# Altium PCB Attempt1-ADC.PcbDoc (part 2 of 2)
Units mil, origin at the board's own origin, x right, y up, seen from the top; angles counter-clockwise.
Board outline 2118.52 x 1463.27 mil, 4 copper layers (Top Layer, GND Layer 2, PWR Layer 3, Bottom Layer), stack 65.52 mil thick; 32 components, 24 nets, 127 pads, 323 vias.
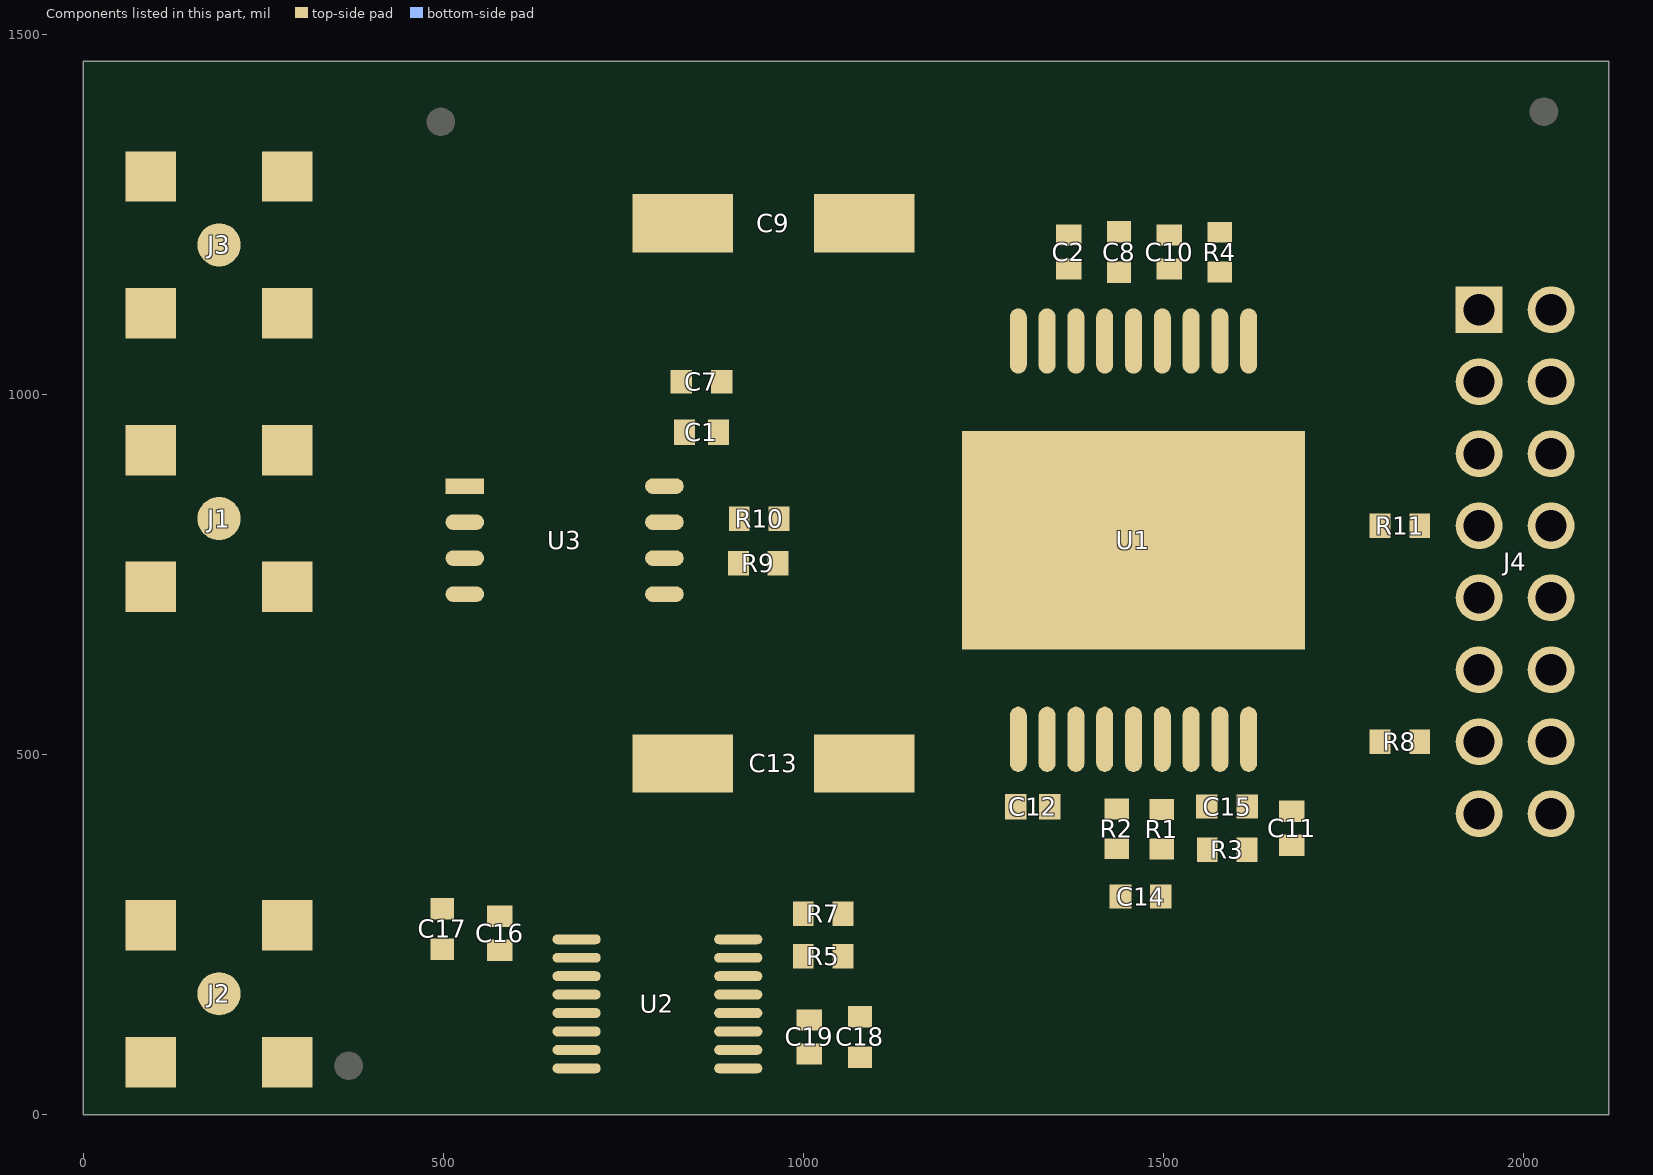
[diagram p4: the components of this part, seen from the top]

## Silkscreen, mask and mechanical layers (free items; w line width, h text height) (continued)
Fab Notes:
  text "N" at 1585,10284.84 h181.06
  text "O" at 1703.33,10284.84 h181.06
  text "T" at 1821.66,10284.84 h181.06
  text "E" at 1901.66,10284.84 h181.06
  text "S" at 1993.32,10284.84 h181.06
  text ":" at 2088.32,10284.84 h181.06
  text "U" at 2169.98,10284.84 h181.06
  text "N" at 2283.31,10284.84 h181.06
  text "L" at 2401.64,10284.84 h181.06
  text "E" at 2483.3,10284.84 h181.06
  text "S" at 2576.63,10284.84 h181.06
  text "S" at 2669.96,10284.84 h181.06
  text "O" at 2798.29,10284.84 h181.06
  text "T" at 2916.62,10284.84 h181.06
  text "H" at 2996.62,10284.84 h181.06
  text "E" at 3113.28,10284.84 h181.06
  text "R" at 3204.94,10284.84 h181.06
  text "W" at 3306.6,10284.84 h181.06
  text "I" at 3454.93,10284.84 h181.06
  text "S" at 3498.26,10284.84 h181.06
  text "E" at 3593.26,10284.84 h181.06
  text "S" at 3719.92,10284.84 h181.06
  text "P" at 3814.92,10284.84 h181.06
  text "E" at 3911.58,10284.84 h181.06
  text "C" at 4003.25,10284.84 h181.06
  text "I" at 4118.24,10284.84 h181.06
  text "F" at 4161.57,10284.84 h181.06
  text "I" at 4248.24,10284.84 h181.06
  text "E" at 4291.57,10284.84 h181.06
  text "D" at 4384.9,10284.84 h181.06
  text "." at 4493.23,10284.84 h181.06
  text "1" at 1585,9969.85 h181.06
  text "." at 1673.33,9969.85 h181.06
  text "F" at 1754.99,9969.85 h181.06
  text "A" at 1836.66,9969.85 h181.06
  text "B" at 1934.99,9969.85 h181.06
  text "R" at 2034.98,9969.85 h181.06
  text "I" at 2136.65,9969.85 h181.06
  text "C" at 2179.98,9969.85 h181.06
  text "A" at 2294.97,9969.85 h181.06
  text "T" at 2384.97,9969.85 h181.06
  text "E" at 2464.97,9969.85 h181.06
  text "P" at 2591.59,9969.85 h181.06
  text "E" at 2688.25,9969.85 h181.06
  text "R" at 2781.58,9969.85 h181.06
  text "I" at 2916.58,9969.85 h181.06
  text "P" at 2959.91,9969.85 h181.06
  text "C" at 3054.91,9969.85 h181.06
  text "-" at 3171.55,9969.85 h181.06
  text "6" at 3226.54,9969.85 h181.06
  text "0" at 3314.87,9969.85 h181.06
  text "1" at 3403.2,9969.85 h181.06
  text "2" at 3493.2,9969.85 h181.06
  text "A" at 3581.53,9969.85 h181.06
  text "C" at 3713.19,9969.85 h181.06
  text "L" at 3828.19,9969.85 h181.06
  text "A" at 3913.19,9969.85 h181.06
  text "S" at 4013.18,9969.85 h181.06
  text "S" at 4106.51,9969.85 h181.06
  text "2" at 4234.84,9969.85 h181.06
  text "." at 4323.17,9969.85 h181.06
  text "2" at 1585,9656.52 h181.06
  text "." at 1673.33,9656.52 h181.06
  text "M" at 1754.99,9656.52 h181.06
  text "A" at 1886.65,9656.52 h181.06
  text "T" at 1976.65,9656.52 h181.06
  text "E" at 2056.64,9656.52 h181.06
  text "R" at 2149.97,9656.52 h181.06
  text "I" at 2251.64,9656.52 h181.06
  text "A" at 2294.97,9656.52 h181.06
  text "L" at 2393.3,9656.52 h181.06
  text ":" at 2476.63,9656.52 h181.06
  text "D" at 1753.32,9341.54 h181.06
  text "I" at 1868.32,9341.54 h181.06
  text "E" at 1911.65,9341.54 h181.06
  text "L" at 2004.98,9341.54 h181.06
  text "E" at 2088.31,9341.54 h181.06
  text "C" at 2179.96,9341.54 h181.06
  text "T" at 2291.61,9341.54 h181.06
  text "R" at 2371.61,9341.54 h181.06
  text "I" at 2473.27,9341.54 h181.06
  text "C" at 2516.61,9341.54 h181.06
  text ":" at 2631.59,9341.54 h181.06
  text "F" at 2713.25,9341.54 h181.06
  text "R" at 2799.92,9341.54 h181.06
  text "4" at 2901.58,9341.54 h181.06
  text "P" at 3023.24,9341.54 h181.06
  text "E" at 3119.9,9341.54 h181.06
  text "R" at 3211.57,9341.54 h181.06
  text "I" at 3346.56,9341.54 h181.06
  text "P" at 3389.89,9341.54 h181.06
  text "C" at 3484.89,9341.54 h181.06
  text "-" at 3601.52,9341.54 h181.06
  text "4" at 3658.18,9341.54 h181.06
  text "1" at 3746.51,9341.54 h181.06
  text "0" at 3834.84,9341.54 h181.06
  text "1" at 3923.17,9341.54 h181.06
  text "W" at 4046.5,9341.54 h181.06
  text "I" at 4194.83,9341.54 h181.06
  text "T" at 4238.16,9341.54 h181.06
  text "H" at 4318.16,9341.54 h181.06
  text "M" at 4469.82,9341.54 h181.06
  text "I" at 4601.48,9341.54 h181.06
  text "N" at 4644.81,9341.54 h181.06
  text "T" at 4796.47,9341.54 h181.06
  text "G" at 4873.14,9341.54 h181.06
  text "1" at 5024.8,9341.54 h181.06
  text "8" at 5113.13,9341.54 h181.06
  text "0" at 5201.46,9341.54 h181.06
  text "D" at 5324.79,9341.54 h181.06
  text "E" at 5439.78,9341.54 h181.06
  text "G" at 5531.44,9341.54 h181.06
  text "R" at 5649.77,9341.54 h181.06
  text "E" at 5751.44,9341.54 h181.06
  text "E" at 5844.77,9341.54 h181.06
  text "C" at 5971.43,9341.54 h181.06
  text "." at 6081.42,9341.54 h181.06
  text "C" at 1753.32,9026.55 h181.06
  text "O" at 1868.32,9026.55 h181.06
  text "P" at 1989.98,9026.55 h181.06
  text "P" at 2086.64,9026.55 h181.06
  text "E" at 2183.31,9026.55 h181.06
  text "R" at 2276.64,9026.55 h181.06
  text ":" at 2378.3,9026.55 h181.06
  text "A" at 2459.96,9026.55 h181.06
  text "S" at 2558.29,9026.55 h181.06
  text "P" at 2686.62,9026.55 h181.06
  text "E" at 2781.62,9026.55 h181.06
  text "R" at 2874.95,9026.55 h181.06
  text "S" at 3009.94,9026.55 h181.06
  text "T" at 3101.61,9026.55 h181.06
  text "A" at 3173.27,9026.55 h181.06
  text "C" at 3266.6,9026.55 h181.06
  text "K" at 3381.6,9026.55 h181.06
  text "U" at 3471.59,9026.55 h181.06
  text "P" at 3584.92,9026.55 h181.06
  text "." at 3658.25,9026.55 h181.06
  text "U" at 1753.32,8711.56 h181.06
  text "." at 1863.32,8711.56 h181.06
  text "L" at 1911.65,8711.56 h181.06
  text "." at 1994.98,8711.56 h181.06
  text "R" at 2076.64,8711.56 h181.06
  text "A" at 2176.64,8711.56 h181.06
  text "T" at 2266.64,8711.56 h181.06
  text "I" at 2346.63,8711.56 h181.06
  text "N" at 2389.96,8711.56 h181.06
  text "G" at 2508.29,8711.56 h181.06
  text ":" at 2626.62,8711.56 h181.06
  text "9" at 2708.29,8711.56 h181.06
  text "4" at 2796.62,8711.56 h181.06
  text "V" at 2884.95,8711.56 h181.06
  text "-" at 2974.9,8711.56 h181.06
  text "0" at 3031.56,8711.56 h181.06
  text "M" at 3153.22,8711.56 h181.06
  text "I" at 3286.55,8711.56 h181.06
  text "N" at 3329.88,8711.56 h181.06
  text "I" at 3448.21,8711.56 h181.06
  text "M" at 3491.54,8711.56 h181.06
  text "U" at 3623.2,8711.56 h181.06
  text "M" at 3736.53,8711.56 h181.06
  text "3" at 1585,8398.24 h181.06
  text "." at 1673.33,8398.24 h181.06
  text "S" at 1754.99,8398.24 h181.06
  text "U" at 1848.32,8398.24 h181.06
  text "R" at 1961.65,8398.24 h181.06
  text "F" at 2063.31,8398.24 h181.06
  text "A" at 2144.98,8398.24 h181.06
  text "C" at 2239.97,8398.24 h181.06
  text "E" at 2354.97,8398.24 h181.06
  text "F" at 2481.63,8398.24 h181.06
  text "I" at 2568.29,8398.24 h181.06
  text "N" at 2611.63,8398.24 h181.06
  text "I" at 2729.96,8398.24 h181.06
  text "S" at 2773.29,8398.24 h181.06
  text "H" at 2868.28,8398.24 h181.06
  text ":" at 2986.61,8398.24 h181.06
  text "E" at 3068.22,8398.24 h181.06
  text "N" at 3161.55,8398.24 h181.06
  text "I" at 3278.22,8398.24 h181.06
  text "G" at 3321.55,8398.24 h181.06
  text "4" at 1585,8083.25 h181.06
  text "." at 1673.33,8083.25 h181.06
  text "S" at 1754.99,8083.25 h181.06
  text "O" at 1849.99,8083.25 h181.06
  text "L" at 1971.65,8083.25 h181.06
  text "D" at 2054.98,8083.25 h181.06
  text "E" at 2169.98,8083.25 h181.06
  text "R" at 2263.31,8083.25 h181.06
  text "M" at 2398.27,8083.25 h181.06
  text "A" at 2529.93,8083.25 h181.06
  text "S" at 2628.26,8083.25 h181.06
  text "K" at 2723.26,8083.25 h181.06
  text "O" at 2851.59,8083.25 h181.06
  text "N" at 2973.25,8083.25 h181.06
  text "B" at 3124.91,8083.25 h181.06
  text "O" at 3223.24,8083.25 h181.06
  text "T" at 3341.57,8083.25 h181.06
  text "H" at 3421.57,8083.25 h181.06
  text "S" at 3573.23,8083.25 h181.06
  text "I" at 3668.23,8083.25 h181.06
  text "D" at 3711.56,8083.25 h181.06
  text "E" at 3824.89,8083.25 h181.06
  text "S" at 3918.22,8083.25 h181.06
  text "O" at 4046.55,8083.25 h181.06
  text "F" at 4168.21,8083.25 h181.06
  text "T" at 4288.2,8083.25 h181.06
  text "H" at 4368.2,8083.25 h181.06
  text "E" at 4486.53,8083.25 h181.06
  text "B" at 4613.19,8083.25 h181.06
  text "O" at 4713.19,8083.25 h181.06
  text "A" at 4831.52,8083.25 h181.06
  text "R" at 4929.85,8083.25 h181.06
  text "D" at 5031.51,8083.25 h181.06
  text "S" at 5179.84,8083.25 h181.06
  text "H" at 5274.84,8083.25 h181.06
  text "A" at 5393.17,8083.25 h181.06
  text "L" at 5491.49,8083.25 h181.06
  text "L" at 5574.83,8083.25 h181.06
  text "B" at 5691.49,8083.25 h181.06
  text "E" at 5791.48,8083.25 h181.06
  text "I" at 5918.01,8083.25 h181.06
  text "P" at 5961.34,8083.25 h181.06
  text "C" at 6056.34,8083.25 h181.06
  text "-" at 6172.99,8083.25 h181.06
  text "S" at 6229.65,8083.25 h181.06
  text "M" at 6324.65,8083.25 h181.06
  text "-" at 6456.3,8083.25 h181.06
  text "8" at 6511.3,8083.25 h181.06
  text "4" at 6599.63,8083.25 h181.06
  text "0" at 6687.96,8083.25 h181.06
  text "C" at 6777.96,8083.25 h181.06
  text "A" at 6926.27,8083.25 h181.06
  text "N" at 7024.6,8083.25 h181.06
  text "D" at 7142.93,8083.25 h181.06
  text "G" at 7291.24,8083.25 h181.06
  text "R" at 7409.57,8083.25 h181.06
  text "E" at 7511.23,8083.25 h181.06
  text "E" at 7604.56,8083.25 h181.06
  text "N" at 7697.89,8083.25 h181.06
  text "I" at 1585,7879.92 h181.06
  text "N" at 1628.33,7879.92 h181.06
  text "C" at 1779.99,7879.92 h181.06
  text "O" at 1894.98,7879.92 h181.06
  text "L" at 2016.64,7879.92 h181.06
  text "O" at 2094.97,7879.92 h181.06
  text "R" at 2216.64,7879.92 h181.06
  text "A" at 2351.61,7879.92 h181.06
  text "N" at 2449.94,7879.92 h181.06
  text "D" at 2568.27,7879.92 h181.06
  text "A" at 2716.6,7879.92 h181.06
  text "P" at 2814.93,7879.92 h181.06
  text "P" at 2911.59,7879.92 h181.06
  text "L" at 3008.25,7879.92 h181.06
  text "E" at 3091.58,7879.92 h181.06
  text "D" at 3183.25,7879.92 h181.06
  text "B" at 3331.57,7879.92 h181.06
  text "A" at 3429.9,7879.92 h181.06
  text "R" at 3528.23,7879.92 h181.06
  text "E" at 3629.9,7879.92 h181.06
  text "C" at 3756.56,7879.92 h181.06
  text "O" at 3871.55,7879.92 h181.06
  text "P" at 3993.22,7879.92 h181.06
  text "P" at 4089.88,7879.92 h181.06
  text "E" at 4186.54,7879.92 h181.06
  text "E" at 4278.21,7879.92 h181.06
  text "R" at 4371.54,7879.92 h181.06
  text "." at 4473.12,7879.92 h181.06
  text "5" at 1585,7564.93 h181.06
  text "." at 1673.33,7564.93 h181.06
  text "S" at 1754.99,7564.93 h181.06
  text "I" at 1849.99,7564.93 h181.06
  text "L" at 1893.32,7564.93 h181.06
  text "K" at 1976.65,7564.93 h181.06
  text "S" at 2104.98,7564.93 h181.06
  text "C" at 2199.97,7564.93 h181.06
  text "R" at 2314.97,7564.93 h181.06
  text "E" at 2416.63,7564.93 h181.06
  text "E" at 2509.96,7564.93 h181.06
  text "N" at 2601.63,7564.93 h181.06
  text "L" at 2753.25,7564.93 h181.06
  text "E" at 2836.58,7564.93 h181.06
  text "G" at 2928.24,7564.93 h181.06
  text "E" at 3046.57,7564.93 h181.06
  text "N" at 3138.23,7564.93 h181.06
  text "D" at 3254.89,7564.93 h181.06
  text "T" at 3403.2,7564.93 h181.06
  text "O" at 3478.19,7564.93 h181.06
  text "B" at 3633.18,7564.93 h181.06
  text "E" at 3733.17,7564.93 h181.06
  text "A" at 3859.83,7564.93 h181.06
  text "P" at 3958.16,7564.93 h181.06
  text "P" at 4054.82,7564.93 h181.06
  text "L" at 4151.49,7564.93 h181.06
  text "I" at 4234.82,7564.93 h181.06
  text "E" at 4278.15,7564.93 h181.06
  text "D" at 4371.48,7564.93 h181.06
  text "P" at 4519.78,7564.93 h181.06
  text "E" at 4616.44,7564.93 h181.06
  text "R" at 4709.77,7564.93 h181.06
  text "L" at 4844.77,7564.93 h181.06
  text "A" at 4928.1,7564.93 h181.06
  text "Y" at 5018.1,7564.93 h181.06
  text "E" at 5108.09,7564.93 h181.06
  text "R" at 5201.42,7564.93 h181.06
  text "S" at 5336.42,7564.93 h181.06
  text "T" at 5428.08,7564.93 h181.06
  text "A" at 5499.75,7564.93 h181.06
  text "C" at 5594.74,7564.93 h181.06
  text "K" at 5709.74,7564.93 h181.06
  text "U" at 5799.74,7564.93 h181.06
  text "P" at 5913.01,7564.93 h181.06
  text "U" at 6043,7564.93 h181.06
  text "S" at 6156.33,7564.93 h181.06
  text "I" at 6251.33,7564.93 h181.06
  text "N" at 6294.66,7564.93 h181.06
  text "G" at 6411.32,7564.93 h181.06
  text "W" at 6562.98,7564.93 h181.06
  text "H" at 6711.31,7564.93 h181.06
  text "I" at 6829.64,7564.93 h181.06
  text "T" at 6872.97,7564.93 h181.06
  text "E" at 6952.97,7564.93 h181.06
  text "N" at 7079.63,7564.93 h181.06
  text "O" at 7197.96,7564.93 h181.06
  text "N" at 7319.62,7564.93 h181.06
  text "-" at 7437.9,7564.93 h181.06
  text "C" at 1585,7361.61 h181.06
  text "O" at 1700,7361.61 h181.06
  text "N" at 1821.66,7361.61 h181.06
  text "D" at 1939.99,7361.61 h181.06
  text "U" at 2053.32,7361.61 h181.06
  text "C" at 2166.65,7361.61 h181.06
  text "T" at 2278.31,7361.61 h181.06
  text "I" at 2358.31,7361.61 h181.06
  text "V" at 2401.64,7361.61 h181.06
  text "E" at 2499.97,7361.61 h181.06
  text "E" at 2626.63,7361.61 h181.06
  text "P" at 2719.96,7361.61 h181.06
  text "O" at 2814.96,7361.61 h181.06
  text "X" at 2933.28,7361.61 h181.06
  text "Y" at 3026.61,7361.61 h181.06
  text "I" at 3149.94,7361.61 h181.06
  text "N" at 3191.61,7361.61 h181.06
  text "K" at 3309.94,7361.61 h181.06
  text "." at 3404.93,7361.61 h181.06
  text "6" at 1585,7046.62 h181.06
  text "." at 1673.33,7046.62 h181.06
  text "1" at 1754.99,7046.62 h181.06
  text "0" at 1843.32,7046.62 h181.06
  text "0" at 1933.32,7046.62 h181.06
  text "%" at 2021.65,7046.62 h181.06
  text "C" at 2193.31,7046.62 h181.06
  text "O" at 2308.3,7046.62 h181.06
  text "N" at 2429.97,7046.62 h181.06
  text "T" at 2548.3,7046.62 h181.06
  text "I" at 2628.29,7046.62 h181.06
  text "N" at 2671.62,7046.62 h181.06
  text "U" at 2789.95,7046.62 h181.06
  text "I" at 2903.28,7046.62 h181.06
  text "T" at 2946.61,7046.62 h181.06
  text "Y" at 3026.61,7046.62 h181.06
  text "T" at 3149.94,7046.62 h181.06
  text "E" at 3229.94,7046.62 h181.06
  text "S" at 3323.27,7046.62 h181.06
  text "T" at 3414.93,7046.62 h181.06
  text "I" at 3494.93,7046.62 h181.06
  text "N" at 3538.26,7046.62 h181.06
  text "G" at 3656.59,7046.62 h181.06
  text "U" at 3808.25,7046.62 h181.06
  text "S" at 3919.91,7046.62 h181.06
  text "I" at 4014.91,7046.62 h181.06
  text "N" at 4058.24,7046.62 h181.06
  text "G" at 4176.57,7046.62 h181.06
  text "D" at 4328.23,7046.62 h181.06
  text "A" at 4439.89,7046.62 h181.06
  text "T" at 4529.89,7046.62 h181.06
  text "A" at 4601.55,7046.62 h181.06
  text "B" at 4699.88,7046.62 h181.06
  text "A" at 4798.21,7046.62 h181.06
  text "S" at 4894.88,7046.62 h181.06
  text "E" at 4989.87,7046.62 h181.06
  text "N" at 5116.54,7046.62 h181.06
  text "E" at 5234.87,7046.62 h181.06
  text "T" at 5326.53,7046.62 h181.06
  text "L" at 5406.53,7046.62 h181.06
  text "I" at 5489.86,7046.62 h181.06
  text "S" at 5533.19,7046.62 h181.06
  text "T" at 5624.85,7046.62 h181.06
  text "S" at 5738.18,7046.62 h181.06
  text "H" at 5831.51,7046.62 h181.06
  text "A" at 5949.84,7046.62 h181.06
  text "L" at 6048.17,7046.62 h181.06
  text "L" at 6131.5,7046.62 h181.06
  text "B" at 6248.16,7046.62 h181.06
  text "E" at 6348.16,7046.62 h181.06
  text "P" at 6474.82,7046.62 h181.06
  text "E" at 6571.48,7046.62 h181.06
  text "R" at 6664.81,7046.62 h181.06
  text "F" at 6766.48,7046.62 h181.06
  text "O" at 6853.14,7046.62 h181.06
  text "R" at 6974.8,7046.62 h181.06
  text "M" at 7076.47,7046.62 h181.06
  text "E" at 7208.13,7046.62 h181.06
  text "D" at 7301.46,7046.62 h181.06
  text "," at 7408.12,7046.62 h181.06
  text "V" at 1585,6843.29 h181.06
  text "E" at 1683.33,6843.29 h181.06
  text "N" at 1776.66,6843.29 h181.06
  text "D" at 1893.32,6843.29 h181.06
  text "O" at 2008.32,6843.29 h181.06
  text "R" at 2129.98,6843.29 h181.06
  text "T" at 2264.98,6843.29 h181.06
  text "O" at 2339.97,6843.29 h181.06
  text "I" at 2494.97,6843.29 h181.06
  text "D" at 2538.3,6843.29 h181.06
  text "E" at 2653.3,6843.29 h181.06
  text "N" at 2746.62,6843.29 h181.06
  text "T" at 2864.95,6843.29 h181.06
  text "I" at 2944.95,6843.29 h181.06
  text "F" at 2988.28,6843.29 h181.06
  text "Y" at 3074.95,6843.29 h181.06
  text "T" at 3198.28,6843.29 h181.06
  text "E" at 3278.27,6843.29 h181.06
  text "S" at 3371.6,6843.29 h181.06
  text "T" at 3463.27,6843.29 h181.06
  text "P" at 3576.6,6843.29 h181.06
  text "A" at 3664.93,6843.29 h181.06
  text "S" at 3763.26,6843.29 h181.06
  text "S" at 3856.59,6843.29 h181.06
  text "E" at 3951.58,6843.29 h181.06
  text "D" at 4043.25,6843.29 h181.06
  text "I" at 4191.57,6843.29 h181.06
  text "N" at 4234.9,6843.29 h181.06
  text "S" at 4386.57,6843.29 h181.06
  text "E" at 4481.56,6843.29 h181.06
  text "C" at 4573.23,6843.29 h181.06
  text "O" at 4688.22,6843.29 h181.06
  text "N" at 4809.88,6843.29 h181.06
  text "D" at 4926.55,6843.29 h181.06
  text "A" at 5038.21,6843.29 h181.06
  text "R" at 5136.54,6843.29 h181.06
  text "Y" at 5233.2,6843.29 h181.06
  text "S" at 5356.53,6843.29 h181.06
  text "I" at 5451.53,6843.29 h181.06
  text "D" at 5494.86,6843.29 h181.06
  text "E" at 5609.86,6843.29 h181.06
  text "." at 5703.19,6843.29 h181.06
  text "7" at 1585,6528.3 h181.06
  text "." at 1673.33,6528.3 h181.06
  text "V" at 1754.99,6528.3 h181.06
  text "E" at 1853.32,6528.3 h181.06
  text "N" at 1946.65,6528.3 h181.06
  text "D" at 2064.98,6528.3 h181.06
  text "O" at 2179.98,6528.3 h181.06
  text "R" at 2301.64,6528.3 h181.06
  text "T" at 2436.63,6528.3 h181.06
  text "O" at 2511.63,6528.3 h181.06
  text "M" at 2666.62,6528.3 h181.06
  text "A" at 2798.29,6528.3 h181.06
  text "K" at 2896.62,6528.3 h181.06
  text "E" at 2991.61,6528.3 h181.06
  text "D" at 3118.27,6528.3 h181.06
  text "A" at 3228.27,6528.3 h181.06
  text "T" at 3318.27,6528.3 h181.06
  text "E" at 3398.26,6528.3 h181.06
  text "C" at 3524.93,6528.3 h181.06
  text "O" at 3639.92,6528.3 h181.06
  text "D" at 3761.59,6528.3 h181.06
  text "E" at 3876.58,6528.3 h181.06
  text "A" at 4003.24,6528.3 h181.06
  text "N" at 4101.57,6528.3 h181.06
  text "D" at 4219.9,6528.3 h181.06
  text "L" at 4368.23,6528.3 h181.06
  text "O" at 4446.56,6528.3 h181.06
  text "G" at 4568.22,6528.3 h181.06
  text "O" at 4686.55,6528.3 h181.06
  text "I" at 4841.55,6528.3 h181.06
  text "N" at 4884.88,6528.3 h181.06
  text "E" at 5036.54,6528.3 h181.06
  text "A" at 5129.87,6528.3 h181.06
  text "C" at 5224.87,6528.3 h181.06
  text "H" at 5339.86,6528.3 h181.06
  text "O" at 5491.52,6528.3 h181.06
  text "R" at 5613.19,6528.3 h181.06
  text "I" at 5748.18,6528.3 h181.06
  text "N" at 5791.51,6528.3 h181.06
  text "L" at 5943.17,6528.3 h181.06
  text "E" at 6026.5,6528.3 h181.06
  text "G" at 6118.17,6528.3 h181.06
  text "E" at 6236.5,6528.3 h181.06
  text "N" at 6329.83,6528.3 h181.06
  text "D" at 6446.49,6528.3 h181.06
  text "." at 6553.15,6528.3 h181.06
  text "8" at 1585,6214.98 h181.06
  text "." at 1673.33,6214.98 h181.06
  text "B" at 1754.99,6214.98 h181.06
  text "O" at 1854.98,6214.98 h181.06
  text "W" at 1978.31,6214.98 h181.06
  text "A" at 2159.97,6214.98 h181.06
  text "N" at 2258.3,6214.98 h181.06
  text "D" at 2376.63,6214.98 h181.06
  text "T" at 2524.96,6214.98 h181.06
  text "W" at 2606.62,6214.98 h181.06
  text "I" at 2754.95,6214.98 h181.06
  text "S" at 2798.28,6214.98 h181.06
  text "T" at 2889.95,6214.98 h181.06
  text "S" at 3003.23,6214.98 h181.06
  text "H" at 3098.22,6214.98 h181.06
  text "A" at 3216.55,6214.98 h181.06
  text "L" at 3314.88,6214.98 h181.06
  text "L" at 3398.21,6214.98 h181.06
  text "N" at 3514.88,6214.98 h181.06
  text "O" at 3633.2,6214.98 h181.06
  text "T" at 3751.53,6214.98 h181.06
  text "E" at 3864.86,6214.98 h181.06
  text "X" at 3958.19,6214.98 h181.06
  text "C" at 4046.52,6214.98 h181.06
  text "E" at 4161.52,6214.98 h181.06
  text "E" at 4254.85,6214.98 h181.06
  text "D" at 4346.51,6214.98 h181.06
  text "0" at 4494.84,6214.98 h181.06
  text "." at 4583.17,6214.98 h181.06
  text "7" at 4631.5,6214.98 h181.06
  text "%" at 4719.83,6214.98 h181.06
  text "O" at 4891.49,6214.98 h181.06
  text "F" at 5013.16,6214.98 h181.06
  text "L" at 5133.15,6214.98 h181.06
  text "O" at 5211.48,6214.98 h181.06
  text "N" at 5333.14,6214.98 h181.06
  text "G" at 5451.47,6214.98 h181.06
  text "E" at 5569.8,6214.98 h181.06
  text "S" at 5663.13,6214.98 h181.06
  text "T" at 5754.8,6214.98 h181.06
  text "S" at 5868.12,6214.98 h181.06
  text "I" at 5963.12,6214.98 h181.06
  text "D" at 6006.45,6214.98 h181.06
  text "E" at 6121.45,6214.98 h181.06
  text "." at 6214.78,6214.98 h181.06
  text "9" at 1585,5899.99 h181.06
  text "." at 1673.33,5899.99 h181.06
  text "D" at 1754.99,5899.99 h181.06
  text "I" at 1869.98,5899.99 h181.06
  text "E" at 1913.32,5899.99 h181.06
  text "L" at 2006.64,5899.99 h181.06
  text "E" at 2089.98,5899.99 h181.06
  text "C" at 2181.64,5899.99 h181.06
  text "T" at 2293.3,5899.99 h181.06
  text "R" at 2373.3,5899.99 h181.06
  text "I" at 2474.96,5899.99 h181.06
  text "C" at 2518.29,5899.99 h181.06
  text "S" at 2633.26,5899.99 h181.06
  text "A" at 2761.58,5899.99 h181.06
  text "N" at 2859.91,5899.99 h181.06
  text "D" at 2976.58,5899.99 h181.06
  text "L" at 3124.9,5899.99 h181.06
  text "I" at 3208.23,5899.99 h181.06
  text "N" at 3251.57,5899.99 h181.06
  text "E" at 3369.9,5899.99 h181.06
  text "W" at 3463.23,5899.99 h181.06
  text "I" at 3611.55,5899.99 h181.06
  text "D" at 3654.89,5899.99 h181.06
  text "T" at 3764.88,5899.99 h181.06
  text "H" at 3844.88,5899.99 h181.06
  text "S" at 3961.54,5899.99 h181.06
  text "M" at 4089.87,5899.99 h181.06
  text "A" at 4221.53,5899.99 h181.06
  text "Y" at 4311.53,5899.99 h181.06
  text "B" at 4434.79,5899.99 h181.06
  text "E" at 4534.78,5899.99 h181.06
  text "A" at 4661.45,5899.99 h181.06
  text "D" at 4759.78,5899.99 h181.06
  text "J" at 4869.77,5899.99 h181.06
  text "U" at 4924.77,5899.99 h181.06
  text "S" at 5038.1,5899.99 h181.06
  text "T" at 5129.76,5899.99 h181.06
  text "E" at 5209.76,5899.99 h181.06
  text "D" at 5301.42,5899.99 h181.06
  text "T" at 5449.71,5899.99 h181.06
  text "O" at 5524.71,5899.99 h181.06
  text "M" at 5679.7,5899.99 h181.06
  text "E" at 5811.37,5899.99 h181.06
  text "E" at 5904.7,5899.99 h181.06
  text "T" at 5996.36,5899.99 h181.06
  text "T" at 6109.69,5899.99 h181.06
  text "H" at 6189.69,5899.99 h181.06
  text "E" at 6308.01,5899.99 h181.06
  text "I" at 6434.68,5899.99 h181.06
  text "M" at 6478.01,5899.99 h181.06
  text "P" at 6609.67,5899.99 h181.06
  text "E" at 6706.33,5899.99 h181.06
  text "D" at 6799.66,5899.99 h181.06
  text "A" at 6911.33,5899.99 h181.06
  text "N" at 7007.99,5899.99 h181.06
  text "C" at 7126.25,5899.99 h181.06
  text "E" at 7241.25,5899.99 h181.06
  text "." at 7334.58,5899.99 h181.06
  text "1" at 1585,5585 h181.06
  text "0" at 1673.33,5585 h181.06
  text "." at 1761.65,5585 h181.06
  text "M" at 1876.64,5585 h181.06
  text "I" at 2008.31,5585 h181.06
  text "N" at 2051.64,5585 h181.06
  text "I" at 2169.97,5585 h181.06
  text "M" at 2213.3,5585 h181.06
  text "U" at 2344.96,5585 h181.06
  text "M" at 2458.29,5585 h181.06
  text "C" at 2623.28,5585 h181.06
  text "O" at 2738.28,5585 h181.06
  text "N" at 2859.94,5585 h181.06
  text "D" at 2978.27,5585 h181.06
  text "U" at 3091.6,5585 h181.06
  text "C" at 3206.6,5585 h181.06
  text "T" at 3318.26,5585 h181.06
  text "O" at 3393.26,5585 h181.06
  text "R" at 3514.92,5585 h181.06
  text "W" at 3649.91,5585 h181.06
  text "I" at 3798.24,5585 h181.06
  text "D" at 3841.57,5585 h181.06
  text "T" at 3951.57,5585 h181.06
  text "H" at 4031.57,5585 h181.06
  text ":" at 4149.9,5585 h181.06
  text "6" at 4231.56,5585 h181.06
  text "M" at 4353.22,5585 h181.06
  text "M" at 4484.88,5585 h181.06
  text "I" at 4616.55,5585 h181.06
  text "L" at 4659.88,5585 h181.06
  text "M" at 2734.91,5270.02 h181.06
  text "I" at 2866.58,5270.02 h181.06
  text "N" at 2909.91,5270.02 h181.06
  text "I" at 3028.24,5270.02 h181.06
  text "M" at 3071.57,5270.02 h181.06
  text "U" at 3203.23,5270.02 h181.06
  text "M" at 3316.54,5270.02 h181.06
  text "S" at 3481.53,5270.02 h181.06
  text "P" at 3576.53,5270.02 h181.06
  text "A" at 3664.86,5270.02 h181.06
  text "C" at 3759.85,5270.02 h181.06
  text "I" at 3874.85,5270.02 h181.06
  text "N" at 3918.18,5270.02 h181.06
  text "G" at 4036.51,5270.02 h181.06
  text ":" at 4154.84,5270.02 h181.06
  text "3" at 4236.5,5270.02 h181.06
  text "." at 4324.83,5270.02 h181.06
  text "4" at 4373.17,5270.02 h181.06
  text "M" at 4494.78,5270.02 h181.06
  text "I" at 4626.44,5270.02 h181.06
  text "N" at 4669.78,5270.02 h181.06
  text "." at 4788.09,5270.02 h181.06
  text "1" at 1585,4956.69 h181.06
  text "1" at 1673.33,4956.69 h181.06
  text "." at 1761.65,4956.69 h181.06
  text "R" at 1843.31,4956.69 h181.06
  text "E" at 1944.98,4956.69 h181.06
  text "Q" at 2036.64,4956.69 h181.06
  text "U" at 2158.3,4956.69 h181.06
  text "E" at 2271.63,4956.69 h181.06
  text "S" at 2364.96,4956.69 h181.06
  text "T" at 2456.63,4956.69 h181.06
  text "F" at 2569.95,4956.69 h181.06
  text "A" at 2651.62,4956.69 h181.06
  text "B" at 2749.95,4956.69 h181.06
  text "R" at 2849.94,4956.69 h181.06
  text "I" at 2951.61,4956.69 h181.06
  text "C" at 2994.94,4956.69 h181.06
  text "A" at 3109.94,4956.69 h181.06
  text "T" at 3199.93,4956.69 h181.06
  text "O" at 3274.93,4956.69 h181.06
  text "R" at 3396.59,4956.69 h181.06
  text "T" at 3531.59,4956.69 h181.06
  text "O" at 3606.58,4956.69 h181.06
  text "A" at 3761.58,4956.69 h181.06
  text "D" at 3859.91,4956.69 h181.06
  text "D" at 3974.9,4956.69 h181.06
  text "T" at 4123.23,4956.69 h181.06
  text "E" at 4203.23,4956.69 h181.06
  text "A" at 4296.56,4956.69 h181.06
  text "R" at 4394.89,4956.69 h181.06
  text "D" at 4529.88,4956.69 h181.06
  text "R" at 4644.88,4956.69 h181.06
  text "O" at 4743.21,4956.69 h181.06
  text "P" at 4864.87,4956.69 h181.06
  text "S" at 4961.54,4956.69 h181.06
  text "I" at 5089.86,4956.69 h181.06
  text "F" at 5133.2,4956.69 h181.06
  text "N" at 5253.19,4956.69 h181.06
  text "O" at 5371.52,4956.69 h181.06
  text "T" at 5489.85,4956.69 h181.06
  text "A" at 5603.18,4956.69 h181.06
  text "D" at 5701.51,4956.69 h181.06
  text "D" at 5816.5,4956.69 h181.06
  text "E" at 5931.5,4956.69 h181.06
  text "D" at 6023.16,4956.69 h181.06
  text "I" at 6171.49,4956.69 h181.06
  text "N" at 6214.82,4956.69 h181.06
  text "T" at 6366.31,4956.69 h181.06
  text "H" at 6446.31,4956.69 h181.06
  text "E" at 6564.64,4956.69 h181.06
  text "G" at 6689.62,4956.69 h181.06
  text "E" at 6807.95,4956.69 h181.06
  text "R" at 6901.28,4956.69 h181.06
  text "B" at 7002.94,4956.69 h181.06
  text "E" at 7102.94,4956.69 h181.06
  text "R" at 7196.27,4956.69 h181.06
  text "." at 7297.93,4956.69 h181.06
  text "1" at 1585,4641.7 h181.06
  text "2" at 1673.33,4641.7 h181.06
  text "." at 1761.65,4641.7 h181.06
  text "A" at 1843.31,4641.7 h181.06
  text "U" at 1938.31,4641.7 h181.06
  text "T" at 2051.64,4641.7 h181.06
  text "O" at 2128.3,4641.7 h181.06
  text "M" at 2249.97,4641.7 h181.06
  text "A" at 2381.63,4641.7 h181.06
  text "T" at 2471.62,4641.7 h181.06
  text "I" at 2551.62,4641.7 h181.06
  text "C" at 2594.95,4641.7 h181.06
  text "I" at 2743.28,4641.7 h181.06
  text "N" at 2786.61,4641.7 h181.06
  text "S" at 2904.94,4641.7 h181.06
  text "P" at 2999.94,4641.7 h181.06
  text "E" at 3096.6,4641.7 h181.06
  text "C" at 3188.27,4641.7 h181.06
  text "T" at 3299.93,4641.7 h181.06
  text "I" at 3379.93,4641.7 h181.06
  text "O" at 3423.26,4641.7 h181.06
  text "N" at 3544.92,4641.7 h181.06
  text "O" at 3696.58,4641.7 h181.06
  text "F" at 3818.24,4641.7 h181.06
  text "A" at 3938.24,4641.7 h181.06
  text "L" at 4036.57,4641.7 h181.06
  text "L" at 4119.9,4641.7 h181.06
  text "L" at 4238.23,4641.7 h181.06
  text "A" at 4323.23,4641.7 h181.06
  text "Y" at 4413.22,4641.7 h181.06
  text "E" at 4503.22,4641.7 h181.06
  text "R" at 4596.55,4641.7 h181.06
  text "S" at 4698.21,4641.7 h181.06
  text "R" at 4824.87,4641.7 h181.06
  text "E" at 4926.54,4641.7 h181.06
  text "Q" at 5018.2,4641.7 h181.06
  text "U" at 5139.86,4641.7 h181.06
  text "I" at 5253.19,4641.7 h181.06
  text "R" at 5296.52,4641.7 h181.06
  text "E" at 5396.52,4641.7 h181.06
  text "D" at 5489.85,4641.7 h181.06
  text "." at 5598.18,4641.7 h181.06
  text "1" at 1585,4326.72 h181.06
  text "3" at 1673.33,4326.72 h181.06
  text "." at 1761.65,4326.72 h181.06
  text "N" at 1843.32,4326.72 h181.06
  text "U" at 1961.65,4326.72 h181.06
  text "M" at 2074.98,4326.72 h181.06
  text "B" at 2206.64,4326.72 h181.06
  text "E" at 2306.63,4326.72 h181.06
  text "R" at 2399.96,4326.72 h181.06
  text "O" at 2534.96,4326.72 h181.06
  text "F" at 2656.62,4326.72 h181.06
  text "L" at 2778.28,4326.72 h181.06
  text "A" at 2863.28,4326.72 h181.06
  text "Y" at 2953.28,4326.72 h181.06
  text "E" at 3043.27,4326.72 h181.06
  text "R" at 3136.6,4326.72 h181.06
  text "S" at 3236.6,4326.72 h181.06
  text "I" at 3364.93,4326.72 h181.06
  text "S" at 3408.26,4326.72 h181.06
  text "6" at 3536.59,4326.72 h181.06
  text "1" at 1585,4013.39 h181.06
  text "4" at 1673.33,4013.39 h181.06
  text "." at 1761.65,4013.39 h181.06
  text "B" at 1843.32,4013.39 h181.06
  text "O" at 1943.31,4013.39 h181.06
  text "A" at 2061.64,4013.39 h181.06
  text "R" at 2159.97,4013.39 h181.06
  text "D" at 2261.64,4013.39 h181.06
  text "T" at 2409.96,4013.39 h181.06
  text "H" at 2489.96,4013.39 h181.06
  text "I" at 2608.29,4013.39 h181.06
  text "C" at 2651.62,4013.39 h181.06
  text "K" at 2766.62,4013.39 h181.06
  text "N" at 2861.61,4013.39 h181.06
  text "E" at 2979.94,4013.39 h181.06
  text "S" at 3073.27,4013.39 h181.06
  text "S" at 3166.6,4013.39 h181.06
  text "I" at 3293.27,4013.39 h181.06
  text "S" at 3336.6,4013.39 h181.06
  text "1" at 3464.93,4013.39 h181.06
  text "." at 3553.26,4013.39 h181.06
  text "6" at 3601.59,4013.39 h181.06
  text "M" at 3689.92,4013.39 h181.06
  text "M" at 3821.58,4013.39 h181.06
  text "1" at 1585,3698.4 h181.06
  text "5" at 1673.33,3698.4 h181.06
  text "." at 1761.66,3698.4 h181.06
  text "R" at 1843.31,3698.4 h181.06
  text "E" at 1944.98,3698.4 h181.06
  text "Q" at 2036.64,3698.4 h181.06
  text "U" at 2158.3,3698.4 h181.06
  text "E" at 2271.63,3698.4 h181.06
  text "S" at 2364.96,3698.4 h181.06
  text "T" at 2456.63,3698.4 h181.06
  text "F" at 2569.95,3698.4 h181.06
  text "A" at 2651.62,3698.4 h181.06
  text "B" at 2749.95,3698.4 h181.06
  text "R" at 2849.94,3698.4 h181.06
  text "I" at 2951.61,3698.4 h181.06
  text "C" at 2994.94,3698.4 h181.06
  text "A" at 3109.94,3698.4 h181.06
  text "T" at 3199.93,3698.4 h181.06
  text "O" at 3274.93,3698.4 h181.06
  text "R" at 3396.59,3698.4 h181.06
  text "T" at 3531.59,3698.4 h181.06
  text "O" at 3606.58,3698.4 h181.06
  text "A" at 3761.58,3698.4 h181.06
  text "D" at 3859.91,3698.4 h181.06
  text "D" at 3974.9,3698.4 h181.06
  text "T" at 4123.23,3698.4 h181.06
  text "E" at 4203.23,3698.4 h181.06
  text "A" at 4296.56,3698.4 h181.06
  text "R" at 4394.89,3698.4 h181.06
  text "D" at 4529.88,3698.4 h181.06
  text "R" at 4644.88,3698.4 h181.06
  text "O" at 4743.21,3698.4 h181.06
  text "P" at 4864.87,3698.4 h181.06
  text "S" at 4961.54,3698.4 h181.06
  text "I" at 5089.86,3698.4 h181.06
  text "F" at 5133.2,3698.4 h181.06
  text "N" at 5253.19,3698.4 h181.06
  text "O" at 5371.52,3698.4 h181.06
  text "T" at 5489.85,3698.4 h181.06
  text "A" at 5603.18,3698.4 h181.06
  text "D" at 5701.51,3698.4 h181.06
  text "D" at 5816.5,3698.4 h181.06
  text "E" at 5931.5,3698.4 h181.06
  text "D" at 6023.16,3698.4 h181.06
  text "I" at 6171.49,3698.4 h181.06
  text "N" at 6214.82,3698.4 h181.06
  text "G" at 6366.48,3698.4 h181.06
  text "E" at 6484.81,3698.4 h181.06
  text "R" at 6576.48,3698.4 h181.06
  text "B" at 6678.14,3698.4 h181.06
  text "E" at 6778.14,3698.4 h181.06
  text "R" at 6871.47,3698.4 h181.06
  text "." at 6973.13,3698.4 h181.06
  text "1" at 1585,3383.42 h181.06
  text "6" at 1673.33,3383.42 h181.06
  text "." at 1761.65,3383.42 h181.06
  text "A" at 1843.31,3383.42 h181.06
  text "U" at 1938.31,3383.42 h181.06
  text "T" at 2051.64,3383.42 h181.06
  text "O" at 2128.3,3383.42 h181.06
  text "M" at 2249.97,3383.42 h181.06
  text "A" at 2381.63,3383.42 h181.06
  text "T" at 2471.62,3383.42 h181.06
  text "I" at 2551.62,3383.42 h181.06
  text "C" at 2594.95,3383.42 h181.06
  text "I" at 2743.28,3383.42 h181.06
  text "N" at 2786.61,3383.42 h181.06
  text "S" at 2904.94,3383.42 h181.06
  text "P" at 2999.94,3383.42 h181.06
  text "E" at 3096.6,3383.42 h181.06
  text "C" at 3188.27,3383.42 h181.06
  text "T" at 3299.93,3383.42 h181.06
  text "I" at 3379.93,3383.42 h181.06
  text "O" at 3423.26,3383.42 h181.06
  text "N" at 3544.92,3383.42 h181.06
  text "O" at 3696.58,3383.42 h181.06
  text "F" at 3818.24,3383.42 h181.06
  text "A" at 3938.24,3383.42 h181.06
  text "L" at 4036.57,3383.42 h181.06
  text "L" at 4119.9,3383.42 h181.06
  text "L" at 4238.23,3383.42 h181.06
  text "A" at 4323.23,3383.42 h181.06
  text "Y" at 4413.22,3383.42 h181.06
  text "E" at 4503.22,3383.42 h181.06
  text "R" at 4596.55,3383.42 h181.06
  text "S" at 4698.21,3383.42 h181.06
  text "R" at 4824.87,3383.42 h181.06
  text "E" at 4926.54,3383.42 h181.06
  text "Q" at 5018.2,3383.42 h181.06
  text "U" at 5139.86,3383.42 h181.06
  text "I" at 5253.19,3383.42 h181.06
  text "R" at 5296.52,3383.42 h181.06
  text "E" at 5396.52,3383.42 h181.06
  text "D" at 5489.85,3383.42 h181.06
  text "." at 5598.18,3383.42 h181.06
  text "1" at 1585,3068.43 h181.06
  text "7" at 1673.33,3068.43 h181.06
  text "." at 1761.65,3068.43 h181.06
  text "N" at 1843.32,3068.43 h181.06
  text "U" at 1961.65,3068.43 h181.06
  text "M" at 2074.98,3068.43 h181.06
  text "B" at 2206.64,3068.43 h181.06
  text "E" at 2306.63,3068.43 h181.06
  text "R" at 2399.96,3068.43 h181.06
  text "O" at 2534.96,3068.43 h181.06
  text "F" at 2656.62,3068.43 h181.06
  text "L" at 2778.28,3068.43 h181.06
  text "A" at 2863.28,3068.43 h181.06
  text "Y" at 2953.28,3068.43 h181.06
  text "E" at 3043.27,3068.43 h181.06
  text "R" at 3136.6,3068.43 h181.06
  text "S" at 3236.6,3068.43 h181.06
  text "I" at 3364.93,3068.43 h181.06
  text "S" at 3408.26,3068.43 h181.06
  text "4" at 3536.52,3068.43 h181.06
  text "." at 3624.85,3068.43 h181.06
  text "1" at 1585,2755.11 h181.06
  text "8" at 1673.33,2755.11 h181.06
  text "." at 1761.66,2755.11 h181.06
  text "A" at 1843.31,2755.11 h181.06
  text "L" at 1941.64,2755.11 h181.06
  text "L" at 2024.97,2755.11 h181.06
  text "V" at 2141.64,2755.11 h181.06
  text "I" at 2239.97,2755.11 h181.06
  text "A" at 2283.3,2755.11 h181.06
  text "S" at 2381.63,2755.11 h181.06
  text "A" at 2509.96,2755.11 h181.06
  text "R" at 2608.29,2755.11 h181.06
  text "E" at 2709.95,2755.11 h181.06
  text "T" at 2836.61,2755.11 h181.06
  text "E" at 2916.61,2755.11 h181.06
  text "N" at 3009.94,2755.11 h181.06
  text "T" at 3128.27,2755.11 h181.06
  text "E" at 3206.6,2755.11 h181.06
  text "D" at 3299.93,2755.11 h181.06
  text "O" at 3448.26,2755.11 h181.06
  text "N" at 3569.92,2755.11 h181.06
  text "B" at 3721.58,2755.11 h181.06
  text "O" at 3821.58,2755.11 h181.06
  text "T" at 3939.91,2755.11 h181.06
  text "H" at 4019.9,2755.11 h181.06
  text "S" at 4171.56,2755.11 h181.06
  text "I" at 4266.56,2755.11 h181.06
  text "D" at 4308.23,2755.11 h181.06
  text "E" at 4423.22,2755.11 h181.06
  text "S" at 4514.88,2755.11 h181.06
  text "U" at 4643.21,2755.11 h181.06
  text "N" at 4756.54,2755.11 h181.06
  text "L" at 4874.87,2755.11 h181.06
  text "E" at 4958.2,2755.11 h181.06
  text "S" at 5051.53,2755.11 h181.06
  text "S" at 5144.86,2755.11 h181.06
  text "S" at 5273.19,2755.11 h181.06
  text "O" at 5368.19,2755.11 h181.06
  text "L" at 5489.85,2755.11 h181.06
  text "D" at 5573.18,2755.11 h181.06
  text "E" at 5688.18,2755.11 h181.06
  text "R" at 5781.51,2755.11 h181.06
  text "M" at 5883.17,2755.11 h181.06
  text "A" at 6013.16,2755.11 h181.06
  text "S" at 6111.49,2755.11 h181.06
  text "K" at 6206.49,2755.11 h181.06
  text "O" at 6334.82,2755.11 h181.06
  text "P" at 6456.48,2755.11 h181.06
  text "E" at 6551.48,2755.11 h181.06
  text "N" at 6644.81,2755.11 h181.06
  text "E" at 6763.14,2755.11 h181.06
  text "D" at 6854.8,2755.11 h181.06
  text "I" at 7003.13,2755.11 h181.06
  text "N" at 7046.46,2755.11 h181.06
  text "G" at 7198.12,2755.11 h181.06
  text "E" at 7316.45,2755.11 h181.06
  text "R" at 7409.78,2755.11 h181.06
  text "B" at 7511.44,2755.11 h181.06
  text "E" at 7611.44,2755.11 h181.06
  text "R" at 7704.77,2755.11 h181.06
  text "." at 7804.77,2755.11 h181.06
  text "1" at 1585,2440.12 h181.06
  text "9" at 1673.33,2440.12 h181.06
  text "." at 1761.66,2440.12 h181.06
  text "B" at 1843.32,2440.12 h181.06
  text "O" at 1943.32,2440.12 h181.06
  text "A" at 2061.65,2440.12 h181.06
  text "R" at 2159.98,2440.12 h181.06
  text "D" at 2261.64,2440.12 h181.06
  text "T" at 2409.97,2440.12 h181.06
  text "H" at 2489.97,2440.12 h181.06
  text "I" at 2608.3,2440.12 h181.06
  text "C" at 2651.63,2440.12 h181.06
  text "K" at 2766.62,2440.12 h181.06
  text "N" at 2861.62,2440.12 h181.06
  text "E" at 2979.95,2440.12 h181.06
  text "S" at 3073.28,2440.12 h181.06
  text "S" at 3166.61,2440.12 h181.06
  text "I" at 3293.27,2440.12 h181.06
  text "S" at 3336.6,2440.12 h181.06
  text "1" at 3464.93,2440.12 h181.06
  text "." at 3553.26,2440.12 h181.06
  text "6" at 3601.59,2440.12 h181.06
  text "M" at 3689.92,2440.12 h181.06
  text "M" at 3821.59,2440.12 h181.06
  text "." at 3953.25,2440.12 h181.06
Layer stackup:
  drawing of 347 lines, arcs and shapes, not listed
  text "Layer" at 2865.47,2250 h60
  text "Name" at 3275.38,2250 h60
  text "Material" at 4605,2250 h60
  text "Thickness" at 5464.77,2250 h60
  text "Constant" at 6114.6,2250 h60
  text "Board Layer Stack" at 6684.46,2250 h60
  text "Top Overlay" at 3275.38,2130 h60
  text "Top Solder" at 3275.38,2010 h60
  text "Solder Resist" at 4605,2010 h60
  text "0.40mil" at 5464.77,2010 h60
  text "3.5" at 6114.6,2010 h60
  text "Top Surface Finish" at 3275.38,1890 h60
  text "Nickel, Gold" at 4605,1890 h60
  text "0.16mil" at 5464.77,1890 h60
  text "1" at 2865.47,1770 h60
  text "Top Layer" at 3275.38,1770 h60
  text "CF-004" at 4605,1770 h60
  text "1.38mil" at 5464.77,1770 h60
  text "Dielectric 2" at 3275.38,1650 h60
  text "PP-006" at 4605,1650 h60
  text "8.28mil" at 5464.77,1650 h60
  text "4.1" at 6114.6,1650 h60
  text "2" at 2865.47,1530 h60
  text "GND Layer 2" at 3275.38,1530 h60
  text "CF-004" at 4605,1530 h60
  text "0.60mil" at 5464.77,1530 h60
  text "Dielectric 1" at 3275.38,1410 h60
  text "FR-4" at 4605,1410 h60
  text "45.00mil" at 5464.77,1410 h60
  text "4.8" at 6114.6,1410 h60
  text "3" at 2865.47,1290 h60
  text "PWR Layer 3" at 3275.38,1290 h60
  text "CF-004" at 4605,1290 h60
  text "0.60mil" at 5464.77,1290 h60
  text "Dielectric 3" at 3275.38,1170 h60
  text "PP-006" at 4605,1170 h60
  text "8.28mil" at 5464.77,1170 h60
  text "4.1" at 6114.6,1170 h60
  text "4" at 2865.47,1050 h60
  text "Bottom Layer" at 3275.38,1050 h60
  text "CF-004" at 4605,1050 h60
  text "1.38mil" at 5464.77,1050 h60
  text "Bottom Surface Finish" at 3275.38,930 h60
  text "Nickel, Gold" at 4605,930 h60
  text "0.16mil" at 5464.77,930 h60
  text "Bottom Solder" at 3275.38,810 h60
  text "Solder Resist" at 4605,810 h60
  text "0.40mil" at 5464.77,810 h60
  text "3.5" at 6114.6,810 h60
  text "Bottom Overlay" at 3275.38,690 h60
Drill Drawing:
  lines w10: 2844.07,210 2844.07,226.67 2860.74,243.33 2844.07,260 2844.07,276.67 2860.74,276.67 2877.41,260 2894.07,276.67 2910.74,276.67 2910.74,260 2894.07,243.33 2910.74,226.67 2910.74,210 2894.07,210 2877.41,226.67 2860.74,210 2844.07,210 ; 2844.07,426.67 2910.74,426.67 2877.41,360 2844.07,426.67 ; 2857.41,413.33 2897.41,413.33 2877.41,373.33 2857.41,413.33
  lines w15: 2784.28,165 9144.56,165 ; 2784.28,465 9144.56,465 ; 3335.16,15 3335.16,615 ; 3935,15 3935,615 ; 5024.68,15 5024.68,615 ; 5530.56,15 5530.56,615 ; 6264.36,15 6264.36,615 ; 7763.91,15 7763.91,615 ; 8353.76,15 8353.76,615 ; 2784.28,15 9144.56,15 9144.56,615 2784.28,615 2784.28,15
  text "Symbol" at 2874.28,510 h72
  text "Count" at 3380.16,510 h72
  text "Hole Size" at 3980,510 h72
  text "Plated" at 5069.68,510 h72
  text "Hole Type" at 5575.56,510 h72
  text "Drill Layer Pair" at 6309.36,510 h72
  text "Via/Pad" at 7808.91,510 h72
  text "Pad Shape" at 8398.76,510 h72
  text "323" at 3380.16,360 h60
  text "10.00mil (0.254mm)" at 3980,360 h60
  text "PTH" at 5069.68,360 h60
  text "Round" at 5575.56,360 h60
  text "Top Layer - Bottom Layer" at 6309.36,360 h60
  text "Via" at 7808.91,360 h60
  text "Rounded" at 8398.76,360 h60
  text "16" at 3380.16,210 h60
  text "43.31mil (1.100mm)" at 3980,210 h60
  text "PTH" at 5069.68,210 h60
  text "Round" at 5575.56,210 h60
  text "Top Layer - Bottom Layer" at 6309.36,210 h60
  text "Pad" at 7808.91,210 h60
  text "(Mixed)" at 8398.76,210 h60
  text "339 Total" at 3380.16,60 h60

## Dimensions
2118.52,1463.27 to 2038.52,1118.27 on Dimensions
0,0 to 2118.52,0 on Dimensions
0,0 to 0,1463.27 on Dimensions

## Text inside footprints (layer, text, board x,y; h text height)
C9: Top Assembly "+" at 1132,1130.94 h60 r180; Top Overlay "+" at 1129.68,1133.87 h60 r180
C13: Top Assembly "+" at 1132,380.94 h60 r180; Top Overlay "+" at 1129.68,383.87 h60 r180
J4: Top Assembly "2" at 2029.52,1233.27 h32 r270; Top Assembly "1" at 1926.52,1226.27 h32 r270; Top Assembly "16" at 2026.52,343.27 h32 r270; Top Assembly "15" at 1920.52,346.27 h32 r270; Top Overlay "16" at 2023.52,343.27 h32 r270; Top Overlay "15" at 1918.52,343.27 h32 r270; Top Overlay "1" at 1923.52,1226.27 h32 r270; Top Overlay "2" at 2027.52,1234.27 h32 r270; Bottom Overlay "16" at 2023.96,291.1 h32 r270; Bottom Overlay "2" at 2023.96,1213.94 h32 r270; Bottom Overlay "1" at 1923.52,1208.27 h32 r270; Bottom Overlay "15" at 1917.66,291.1 h32 r270